# Allegro board LINEAR.brd
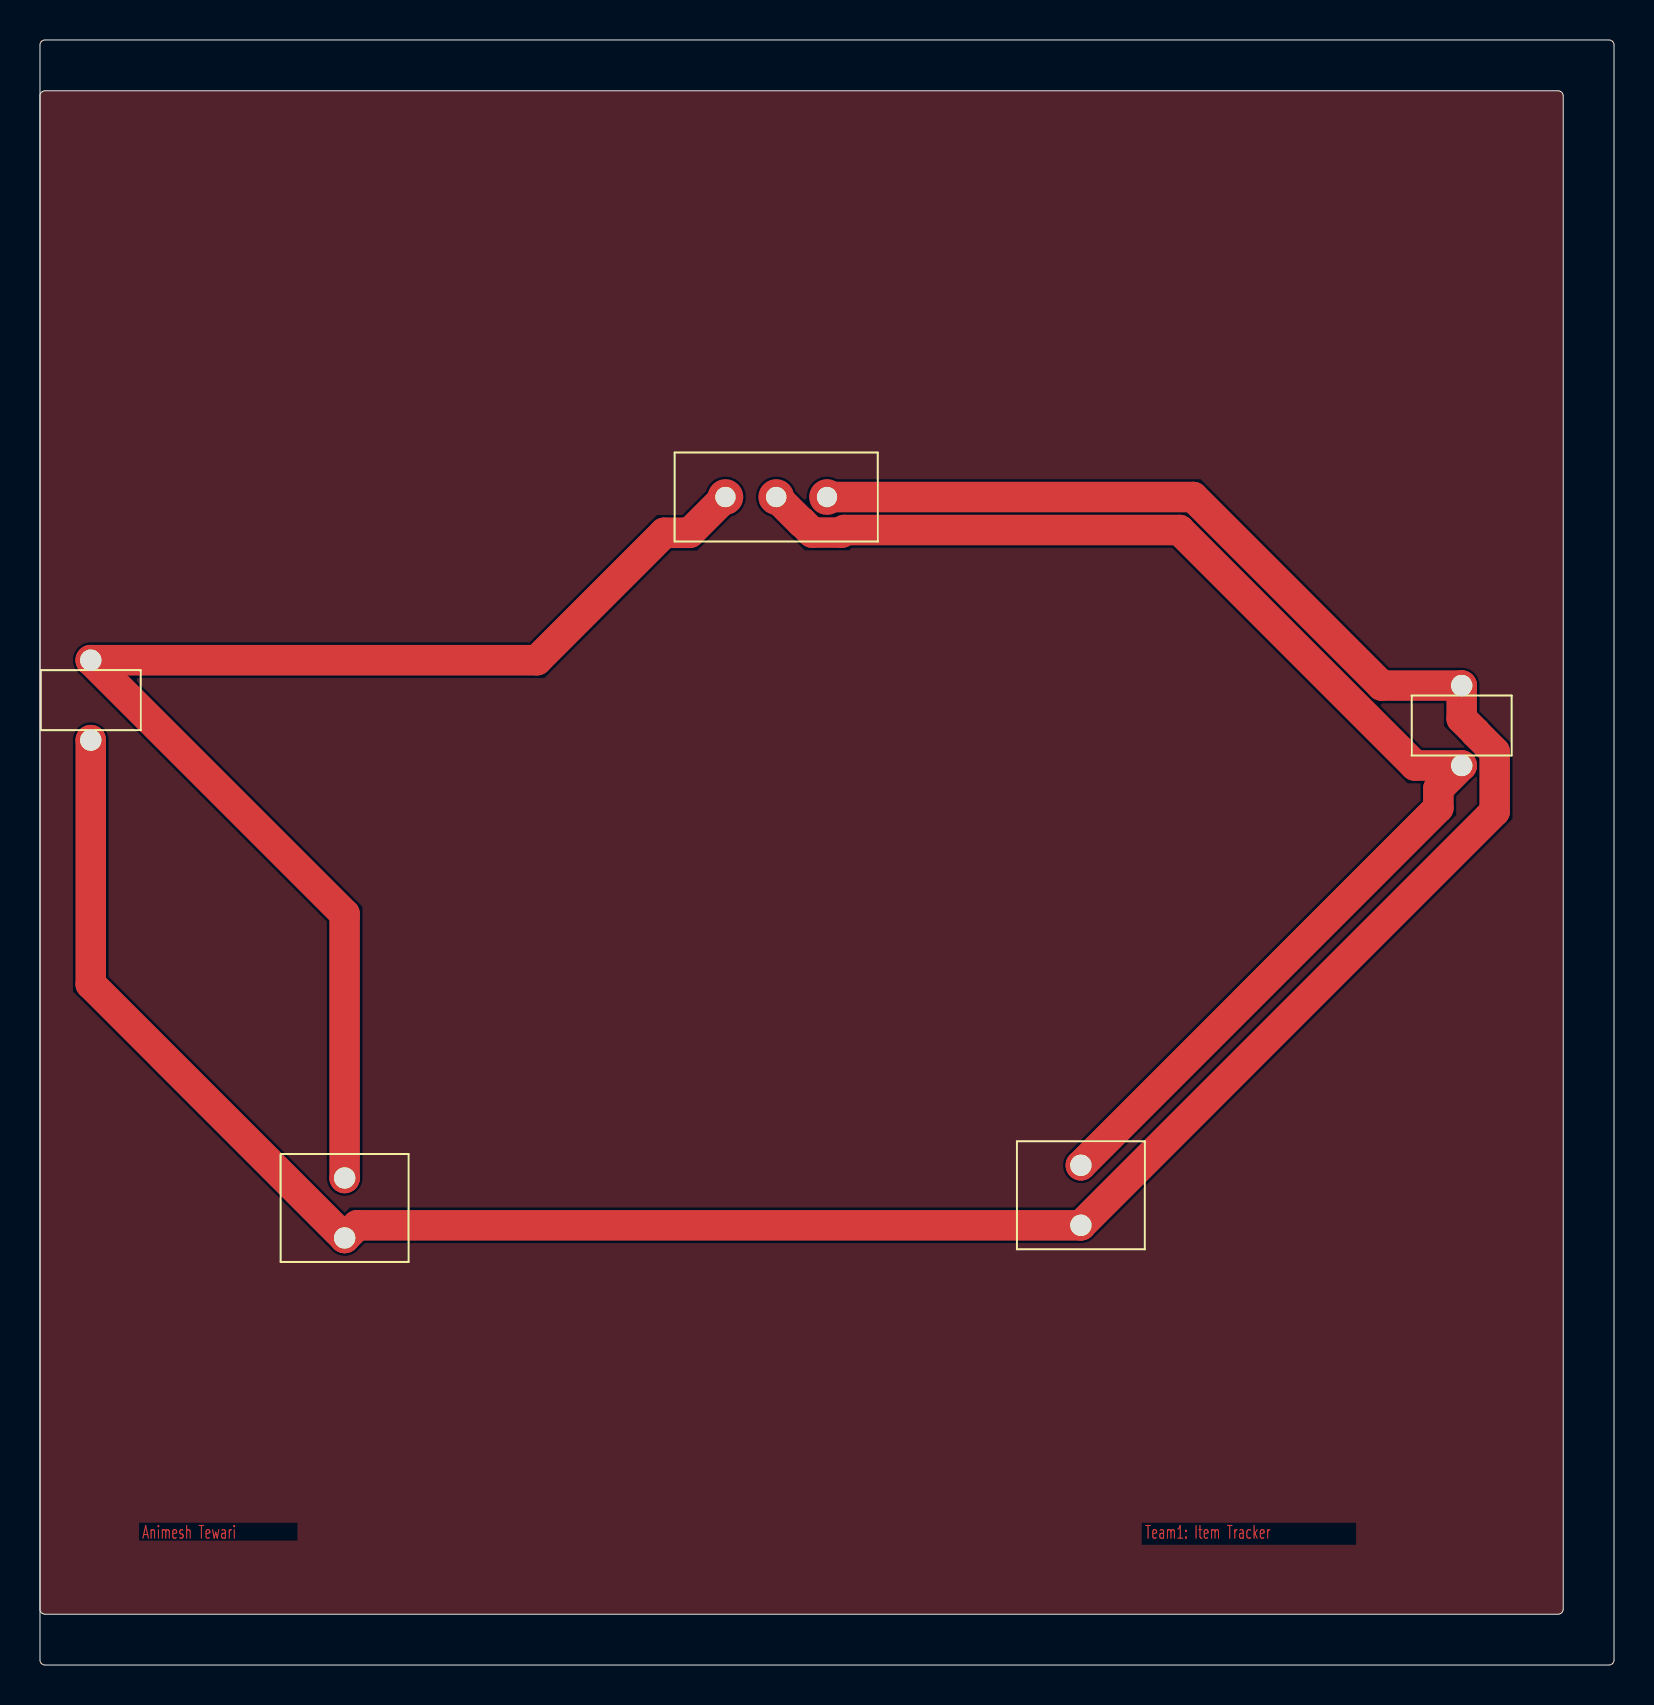
[diagram p0: board, top side]
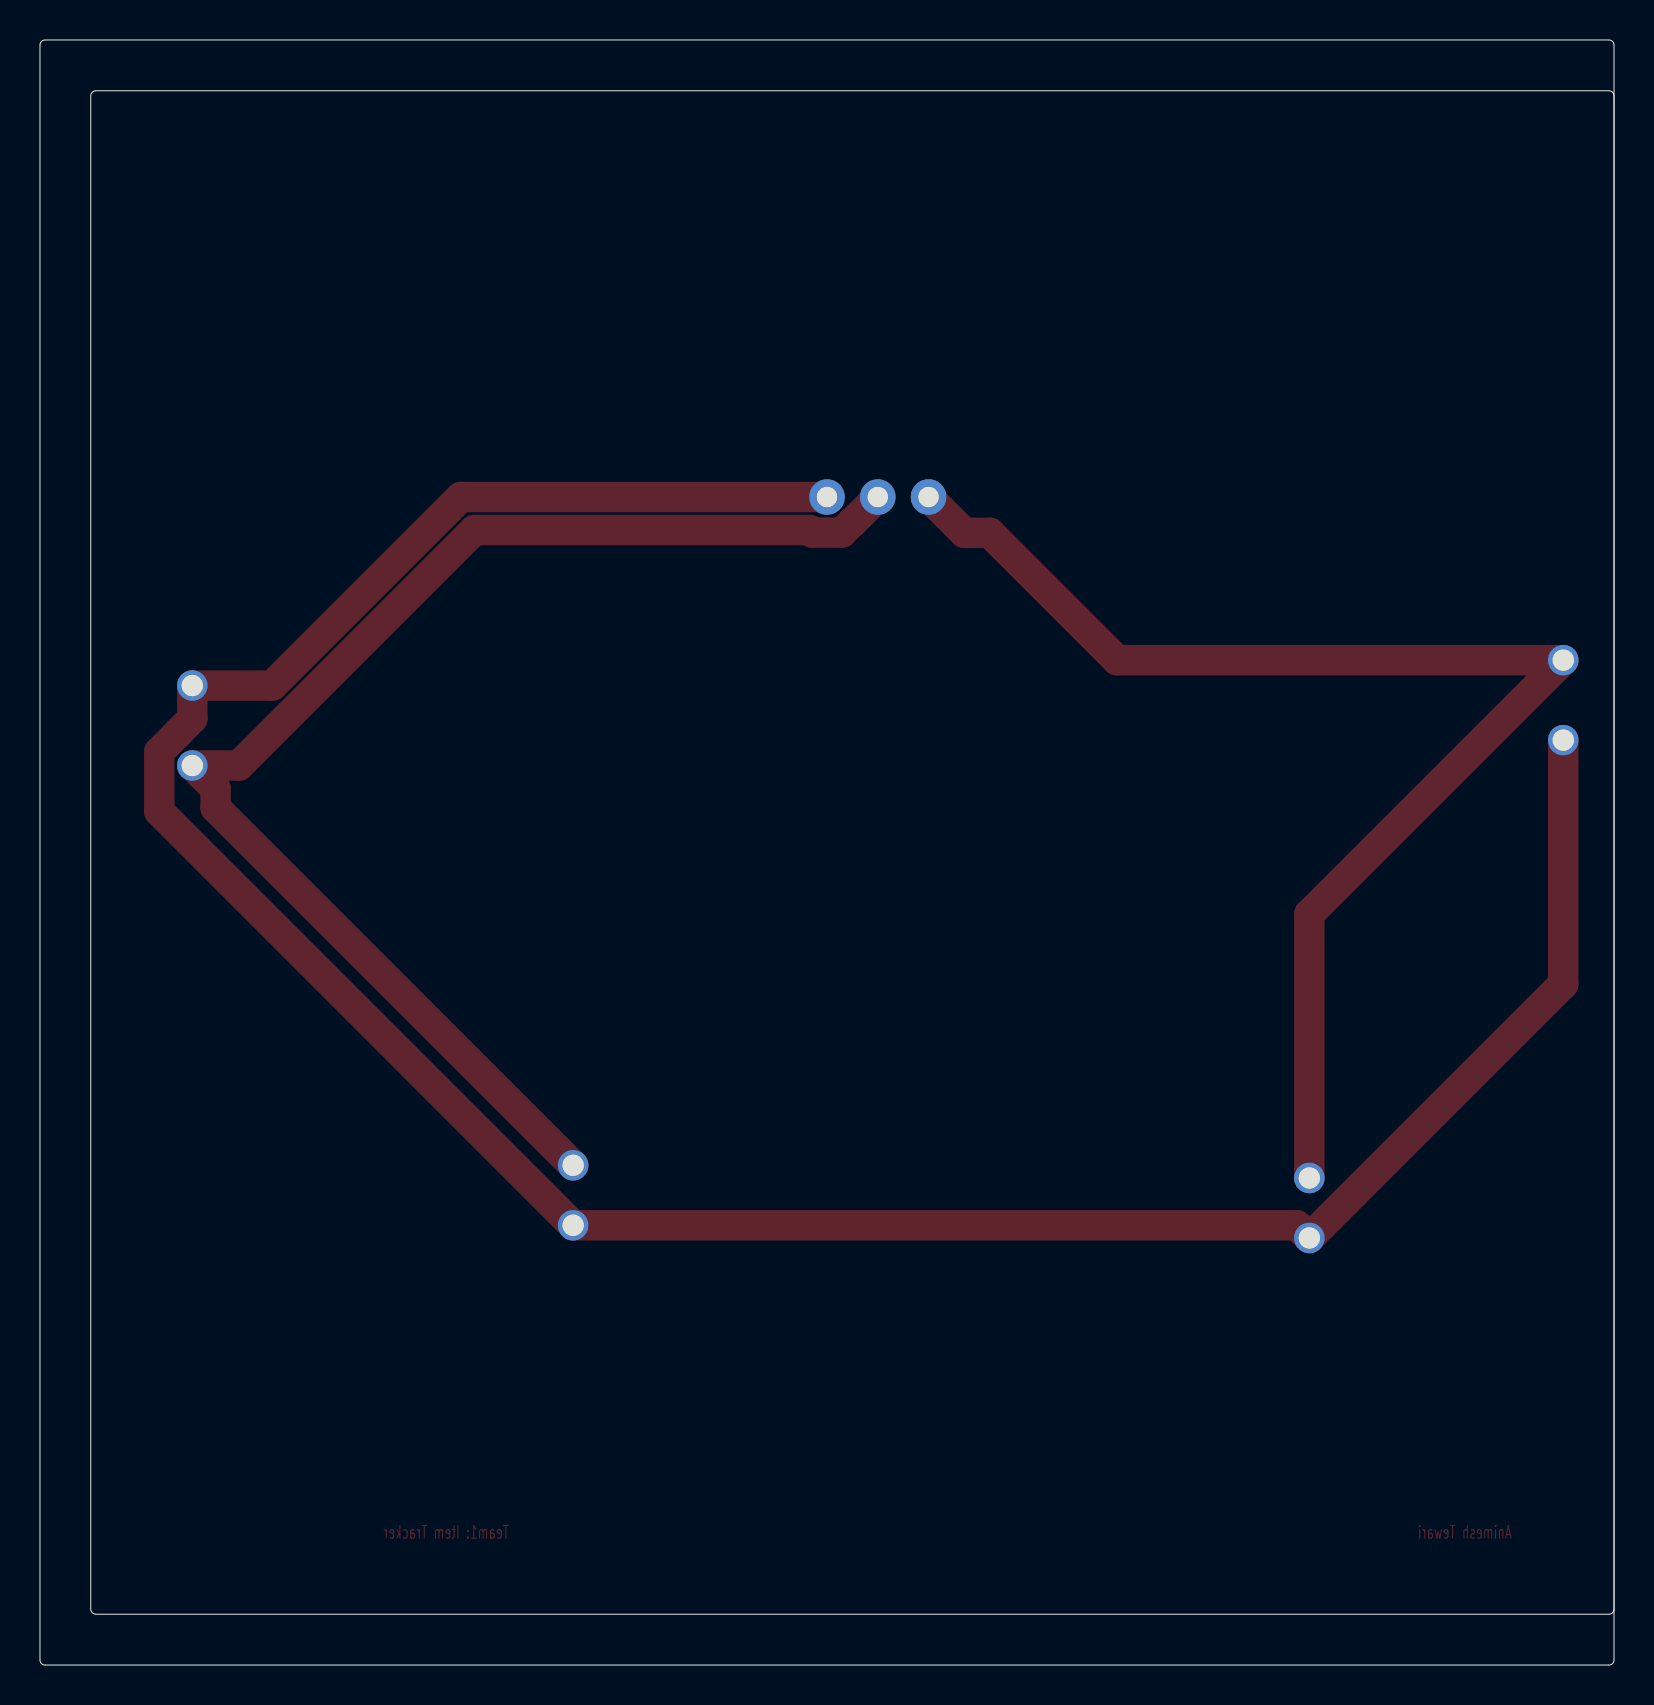
[diagram p1: board, bottom side, seen from below]

Outline 78.74 x 81.28 mm; copper layers: TOP, BOTTOM. Coordinates in mm from the lower left corner of the outline.
Outline path: 0,81.03 0,0.25 arc(0.07,0.07) 0.25,0 78.49,0 arc(78.67,0.07) 78.74,0.25 78.74,81.03 arc(78.67,81.21) 78.49,81.28 0.25,81.28 arc(0.07,81.21) 0,81.03 ; 0,78.49 0,2.79 arc(0.07,2.61) 0.25,2.54 75.95,2.54 arc(76.13,2.61) 76.2,2.79 76.2,78.49 arc(76.13,78.67) 75.95,78.74 0.25,78.74 arc(0.07,78.67) 0,78.49

## Placement (name value [footprint] x y rotation side)
CI  0.33uF  [H2]  15.24 22.86 0 top
CO  0.1uF  [H2]  52.07 23.5 0 top
J1  CON2  [CAP]  2.54 48.26 270 top
J2  CON2  [CAP]  71.12 46.99 90 top
U1  LM7895  [3]  36.83 58.42 90 top

## Library data of the parts
CI CO = CAP NP
J1 J2 = CON2
U1 = Linear regulator

## Footprints (pads in the part's own frame, mm; a bottom-side part is the same pattern mirrored in y, then rotated)
3
  round 1.778 hole 1.016: 1(0,2.54) 2(0,-2.54) 3(0,0)
CAP
  round 1.524 hole 1.067: 1(-2,0) 2(2,0)
H2
  round 1.524 hole 1.067: 1(0,1.5) 2(0,-1.5)

## Nets
GND: CI.2 CO.2 J1.2 J2.2 U1.2(GEOUND)
N00203: CI.1 J1.1 U1.1(INPUT)
N00207: CO.1 J2.1 U1.3(OUTPUT)

## Routing (per net, layer and track width the routed paths; a pad name or vN(x,y) marks a point on that pad's centre or on a via; arc(x,y) is an arc through that point)
GND: length 139.2
  TOP w1.524: U1.2 57.69,58.42 67.12,48.99 J2.2 71.12,47.34 71.8,46.65 71.8,46.64 72.77,45.67 72.77,42.7 CO.2 15.88,21.99 CI.2 2.54,34.06 J1.2
N00203: length 66.3
  TOP w1.524: U1.1 32.5,56.63 31.23,56.63 24.86,50.26 J1.1 15.24,37.56 CI.1
N00207: length 67.8
  TOP w1.524: U1.3 38.09,57.16 38.11,57.16 38.63,56.64 40.11,56.64 40.23,56.77 57.01,56.77 68.78,44.99 J2.1 69.95,43.82 69.95,42.88 CO.1

## Copper pours and planes (outline as drawn; the poured copper is in the pictures)
Net_1 on TOP: 0,2.79 0.07,2.61 0.25,2.54 75.95,2.54 76.13,2.61 76.2,2.79 76.2,78.49 76.13,78.67 75.95,78.74 0.25,78.74 0.07,78.67 0,78.49

## Text on the board
TOP: Animesh Tewari | Team1: Item Tracker
